# EAGLE board wordclock_final (EAGLE 9.6.2)
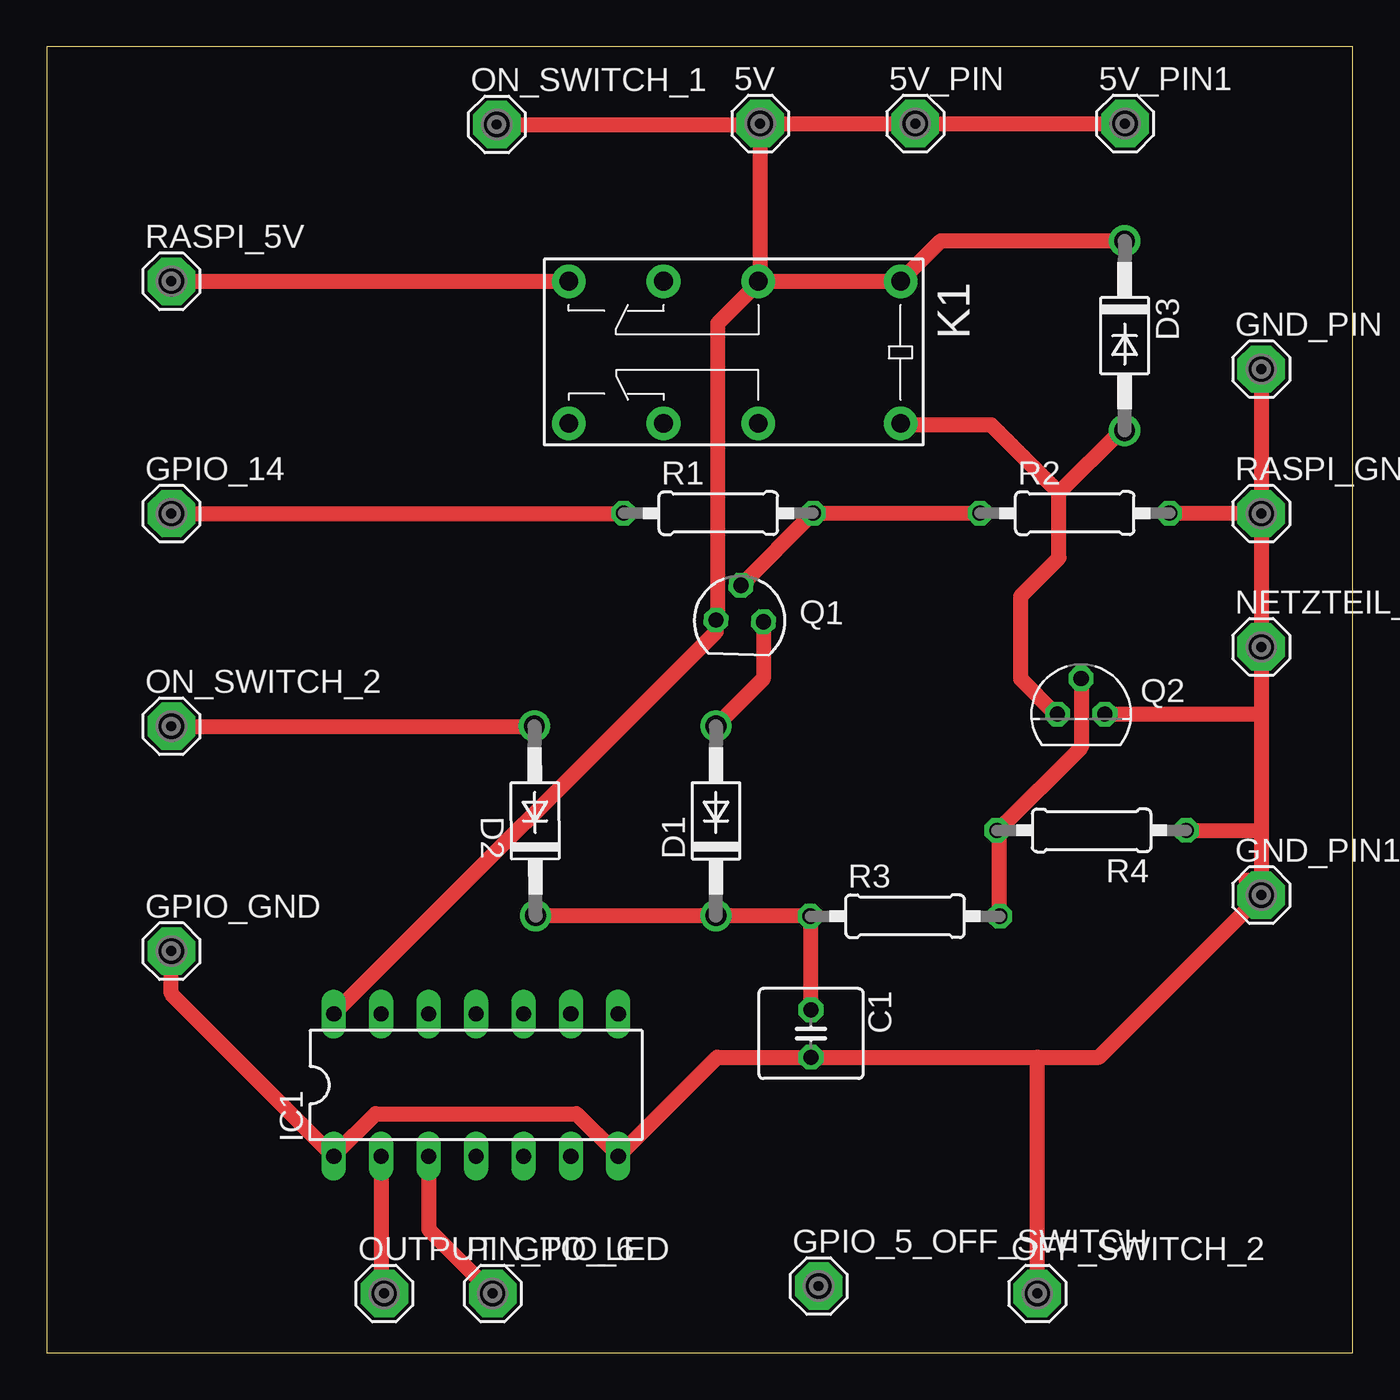
[diagram p0: board, top side]
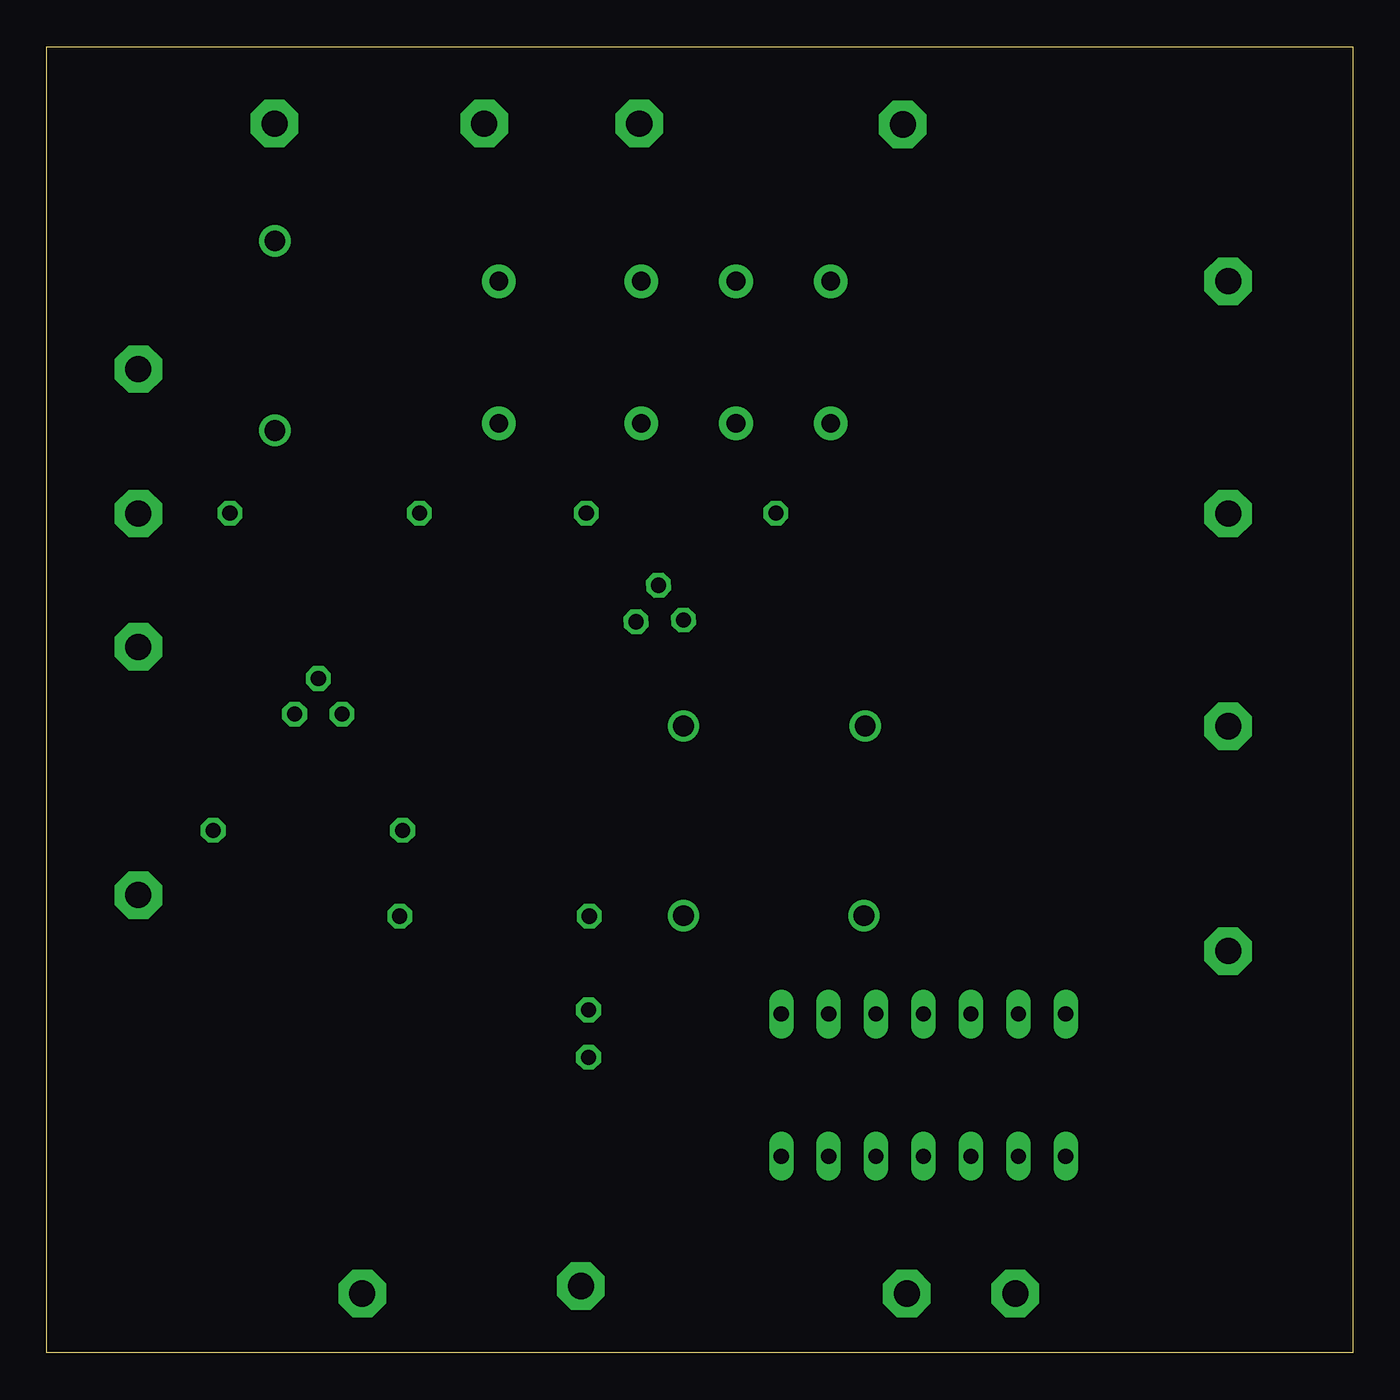
[diagram p1: board, bottom side, seen from below]

Size 70 x 70 mm. Coordinates in mm from the lower left corner, seen from the top.
Outline: 0,0 70,0 70,70 0,70 0,0
Copper layers (1*16): Top 0.035mm / dielectric 1.5mm / Bottom 0.035mm
Design rules "default": minimum track width 6mil, minimum drill 0.35mm, track to track 6mil, track to pad 6mil, pad to pad 6mil, via to via 6mil, smd to smd 6mil, copper to edge 40mil, drill to drill 6mil, minimum pad ring 10mil, minimum via ring 8mil, stop-mask expansion 4mil, vias tented up to drill 0mil, thermal gap 10mil

## Footprints (pad centres in the part's own frame; a part is rotated, then mirrored left to right if it is on the bottom)
SE14 = drill 1.397 pad 2.54 octagon: MP 0,0
C025-060X050 = drill 0.813 octagon: 1 -1.27,0; 2 1.27,0
DO41-10 = drill 1.118: A 5.08,0; C -5.08,0
DIL14 = drill 0.813 long: 1 -7.62,-3.81; 2 -5.08,-3.81; 3 -2.54,-3.81; 4 0,-3.81; 5 2.54,-3.81; 6 5.08,-3.81; 7 7.62,-3.81; 8 7.62,3.81; 9 5.08,3.81; 10 2.54,3.81; 11 0,3.81; 12 -2.54,3.81; 13 -5.08,3.81; 14 -7.62,3.81
G5V-2 = drill 1 pad 1.8: 1 -8.89,-3.81; 4 -1.27,-3.81; 6 3.81,-3.81; 8 8.89,-3.81; 9 8.89,3.81; 11 3.81,3.81; 13 -1.27,3.81; 16 -8.89,3.81
SOT54A = drill 0.813 octagon: B 0,1.905; C -1.27,0; E 1.27,0
TO92 = drill 0.813 octagon: 1 1.27,0; 2 0,1.905; 3 -1.27,0
0207/10 = drill 0.813 octagon: 1 -5.08,0; 2 5.08,0

## Placement (x,y rotation side)
5V  SE14  [SE14]  38.24,65.88 0 top
5V_PIN  SE14  [SE14]  46.55,65.88 0 top
5V_PIN1  SE14  [SE14]  57.79,65.88 0 top
C1  100u  [C025-060X050]  40.96,17.11 270 top
D1  1N4004  [DO41-10]  35.87,28.51 90 top
D2  1N4004  [DO41-10]  26.17,28.51 90.4 top
D3  1N4004  [DO41-10]  57.77,54.51 270 top
GND_PIN  SE14  [SE14]  65.09,52.72 0 top
GND_PIN1  SE14  [SE14]  65.09,24.53 0 top
GPIO_5_OFF_SWITCH  SE14  [SE14]  41.37,3.58 0 top
GPIO_14  SE14  [SE14]  6.68,44.98 0 top
GPIO_GND  SE14  [SE14]  6.68,21.53 0 top
IC1  74AC125N  [DIL14]  23.01,14.35 0 top
K1  G5V-2  [G5V-2]  36.87,53.62 180 top
NETZTEIL_GND  SE14  [SE14]  65.09,37.83 0 top
OFF_SWITCH_2  SE14  [SE14]  53.09,3.18 0 top
ON_SWITCH_1  SE14  [SE14]  24.12,65.83 0 top
ON_SWITCH_2  SE14  [SE14]  6.68,33.58 0 top
OUTPUT_GPIO_6  SE14  [SE14]  18.09,3.18 0 top
PIN_TO_LED  SE14  [SE14]  23.9,3.18 0 top
Q1  BC547  [SOT54A]  37.14,39.23 357.8 top
Q2  BC517  [TO92]  55.44,34.23 0 top
R1  4.7k  [0207/10]  36,45 0 top
R2  100k  [0207/10]  55.1,45 0 top
R3  100k  [0207/10]  46,23.4 0 top
R4  470k  [0207/10]  56,28 180 top
RASPI_5V  SE14  [SE14]  6.68,57.43 0 top
RASPI_GND  SE14  [SE14]  65.09,44.98 0 top

## Library data of the parts
5V 5V_PIN 5V_PIN1 GND_PIN GND_PIN1 GPIO_5_OFF_SWITCH GPIO_14 GPIO_GND NETZTEIL_GND OFF_SWITCH_2 ON_SWITCH_1 ON_SWITCH_2 OUTPUT_GPIO_6 PIN_TO_LED RASPI_5V RASPI_GND = solpad
C1 = rcl; SPICEPREFIX: C
D1-D3 = diode
IC1 = 74xx-eu
K1 = relay; MPN: G5V-2 5DC; OC_FARNELL: 9949488; OC_NEWARK: 78K5703
Q1 = transistor-small-signal
Q2 = transistor-npn
R1-R4 = rcl; SPICEPREFIX: R

## Nets
GND: C1.2 GND_PIN1.MP GND_PIN.MP GPIO_GND.MP IC1.1 IC1.7 NETZTEIL_GND.MP OFF_SWITCH_2.MP Q2.1 R2.2 R4.1 RASPI_GND.MP
N$1: Q1.B R1.2 R2.1
N$2: D1.A Q1.E
N$3: D2.A ON_SWITCH_2.MP
N$4: IC1.2 OUTPUT_GPIO_6.MP
N$5: Q2.2 R3.2 R4.2
N$6: D3.A K1.16 Q2.3
N$7: 5V.MP 5V_PIN1.MP 5V_PIN.MP D3.C IC1.14 K1.1 K1.4 ON_SWITCH_1.MP Q1.C
N$8: C1.1 D1.C D2.C R3.1
N$10: GPIO_14.MP R1.1
N$11: K1.8 RASPI_5V.MP
N$12: IC1.3 PIN_TO_LED.MP

## Tracks (layer width: path | path; a pad name or v marks a point on that pad's centre or on a via)
GND
  Top 0.152: NETZTEIL_GND.MP 65.08,37.95 65.16,38.04
  Top 0.813: GND_PIN1.MP 64.29,25.33 65.09,25.33 NETZTEIL_GND.MP 65.09,34.29 65.03,34.23 Q2.1 | GND_PIN1.MP 65.09,28.04 65.05,28 R4.1 | RASPI_GND.MP 65.09,38.11 65.16,38.04 65.7,37.5 | GND_PIN.MP RASPI_GND.MP | R2.2 65.07,45 RASPI_GND.MP | 53.1,15.84 C1.2 35.93,15.84 IC1.7 30.53,10.64 30.53,10.69 28.39,12.82 17.62,12.82 15.39,10.59 IC1.1 6.68,19.25 GPIO_GND.MP | 53.1,15.84 56.4,15.84 GND_PIN1.MP | OFF_SWITCH_2.MP 53.09,15.83 53.1,15.84
N$1
  Top 0.813: Q1.B R1.2 | R1.2 | R1.2 R2.1
N$2
  Top 0.813: Q1.E 38.41,36.13 D1.A
N$3
  Top 0.813: ON_SWITCH_2.MP D2.A
N$4
  Top 0.813: IC1.2 17.93,3.34 OUTPUT_GPIO_6.MP
N$5
  Top 0.152: 51.05,27.89 50.96,27.97 R4.2 51.05,28.04 55.32,32.31 55.32,36.12 Q2.2
  Top 0.813: Q2.2 55.44,32.45 50.96,27.97 | R3.2 51.05,23.43 51.05,27.89
N$6
  Top 0.152: 54.25,46.1 54.25,46.18 | 54.25,46.18 57.4,49.32 D3.A | 54.25,46.18 50.75,49.68 45.87,49.68 45.84,49.72 K1.16
  Top 0.813: Q2.3 54.07,34.23 52.2,36.1 52.2,40.55 54.25,42.6 54.25,46.1 | 54.25,46.1 50.63,49.72 45.84,49.72 | 54.25,46.1 57.58,49.43 D3.A
N$7
  Top 0.152: 38.25,57.45 45.72,57.45 K1.1 | 38.21,65.84 38.25,65.84 38.25,57.45 | 38.21,65.84 24.23,65.84 ON_SWITCH_1.MP | 38.21,65.84 5V.MP 37.75,65.84 | 5V_PIN.MP 46.48,65.99 38.86,65.99 38.79,65.92 | 38.25,57.45 K1.4 38.1,57.3 37.75,56.95
  Top 0.813: ON_SWITCH_1.MP 38.7,65.83 38.79,65.92 | 46.32,65.88 5V.MP 38.24,57.44 38.1,57.3 | 5V_PIN.MP 5V_PIN1.MP | IC1.14 35.87,38.64 Q1.C 35.98,39.38 35.98,55.18 37.75,56.95 | K1.4 K1.1 47.92,59.59 D3.C
  Bottom 0.152: 57.76,65.99 5V_PIN1.MP | 46.63,65.99 5V_PIN.MP
N$8
  Top 0.813: D2.C D1.C | D1.C | D1.C 40.89,23.43 R3.1 40.92,18.42 C1.1
N$10
  Top 0.813: GPIO_14.MP 30.9,44.98 R1.1
N$11
  Top 0.813: RASPI_5V.MP K1.8
N$12
  Top 0.813: IC1.3 20.47,6.61 PIN_TO_LED.MP